# Altium PCB 模块封装大小.PcbDoc
Units mm, origin at the board's own origin, x right, y up, seen from the top; angles counter-clockwise.
Board outline 39.91 x 49.81 mm, 2 copper layers (Top Layer, Bottom Layer); 8 components, 31 nets, 86 pads, 0 vias.
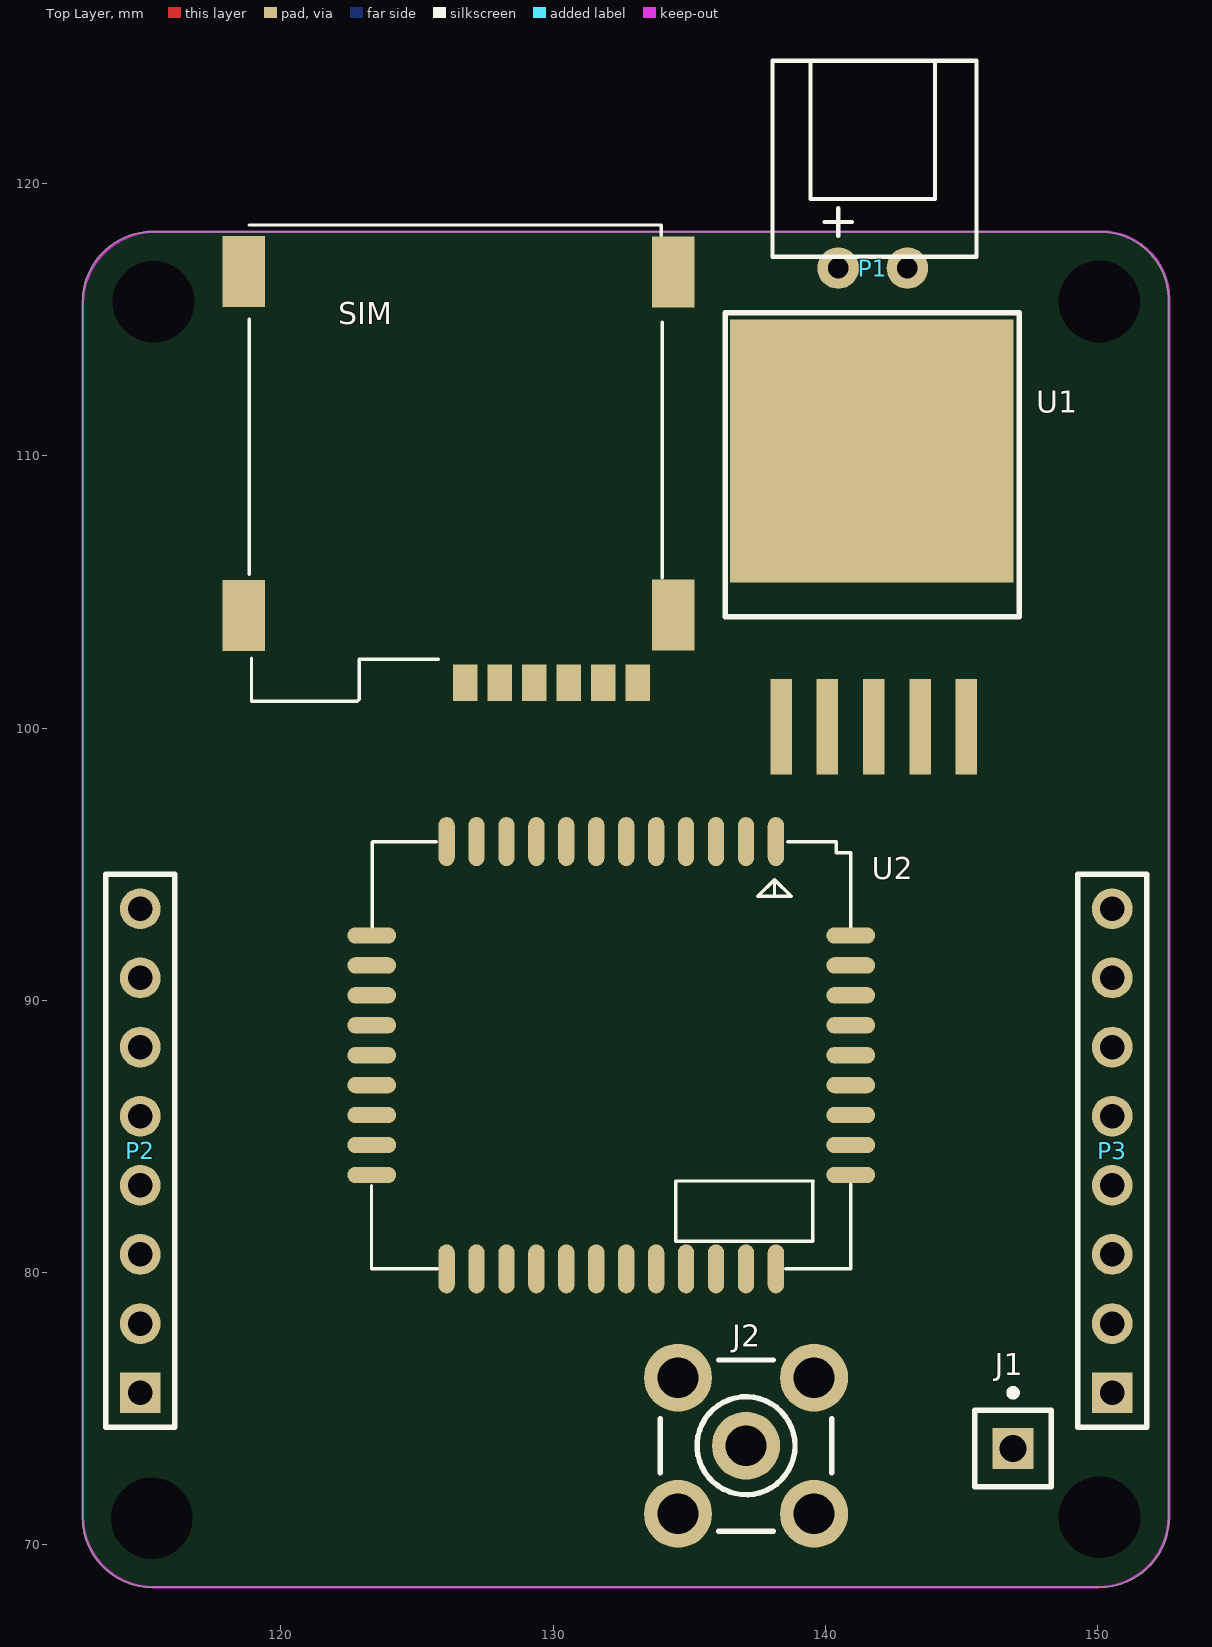
[diagram p0: Top Layer view]
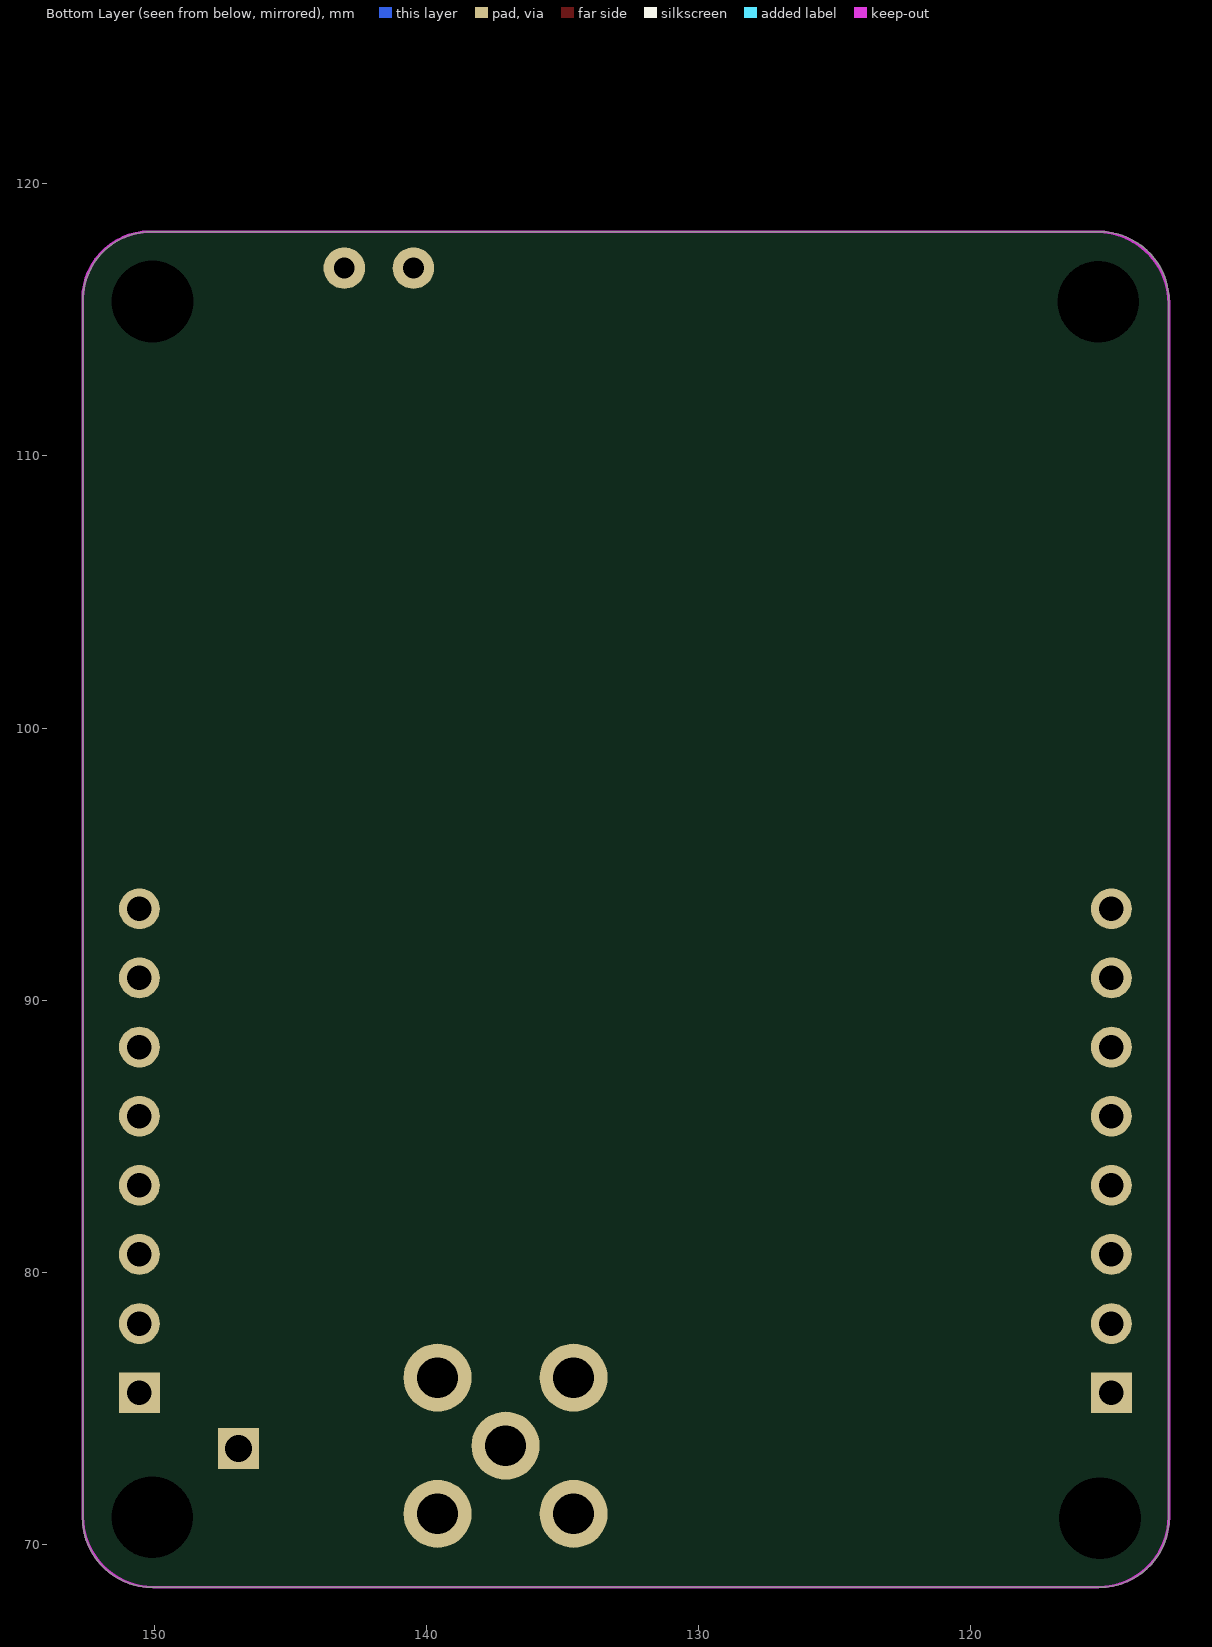
[diagram p1: Bottom Layer view, seen from below]

## Layer stack, top to bottom
Top Layer: signal copper 0.0356
Dielectric: dielectric 0.32, FR-4, Dk 4.8
Bottom Layer: signal copper 0.0356

## Board outline
112.717,93.015 112.717,115.697 cw(c115.257,115.697) 115.257,118.237 116.967,118.237 150.089,118.237 cw(c150.089,115.697) 152.629,115.697 152.629,104.902 152.629,70.968 cw(c150.089,70.968) 150.089,68.428 145.085,68.428 115.257,68.428 cw(c115.257,70.968) 112.717,70.968 112.717,88.849

## Design rules (kind name [scope] priority, off if disabled: settings)
Clearance [All] p1: gap=0.4
PolygonConnect [All] p1: connectstyle=Relief reliefconductorwidth=0.254 reliefentries=4 polygonreliefangle="90 Angle"
RoutingLayers [All] p1: top layer_v5=TRUE bottom layer_v5=FALSE
RoutingVias [All] p1: holewidth=0.511 width=1 viastyle="Through Hole" minholewidth=0.511 minwidth=1 maxholewidth=0.511 maxwidth=1
SilkscreenOverComponentPads [All] p1: minsilkscreentomaskgap=0.254
SolderMaskExpansion [All] p1: expansion=0.102
TestPointUsage [All] p1: valid=0 allowmultiple=FALSE
Testpoint [All] p1: side=15 testpointundercomponent=TRUE minsize=1.016 maxsize=2.54 preferedsize=1.524 minholesize=0 maxholesize=1.016 preferedholesize=0.813 testpointgrid=0.025 style=1023 order=0123456789
Width Width_1 [InNet('NetIPX2_2')] p1: maxlimit=0.6 minlimit=0.6 preferedwidth=0.6
Width Width_6 [InNet('SIM_VDD')] p2: maxlimit=0.5 minlimit=0.5 preferedwidth=0.5
Width Width_5 [InNet('NetIPX1_2')] p3: maxlimit=0.6 minlimit=0.6 preferedwidth=0.6
Width Width_3 [InNet('VCC')] p4: maxlimit=1.3 minlimit=1.3 preferedwidth=1.3
Width Width_2 [InNet('VCC_IN')] p5: maxlimit=1.3 minlimit=1.3 preferedwidth=1.3
Width [All] p6: maxlimit=0.254 minlimit=0.254 preferedwidth=0.254
22 further rules are at their usual default settings.

## Components (designator, comment, footprint, x,y, rotation, side; value= is the part's Value field where it differs from the comment)
J1 "Socket" PIN1 146.901,73.524 r0 top
J2 "SMB" SMB_V-RJ45 137.09,73.629 r0 top locked
P1 "Header 2" XH2.54 140.478,116.899 r180 top
P2 "Header 8" HDR1X8 114.832,75.577 r90 top
P3 "Header 8" HDR1X8 150.544,75.577 r90 top
SIM "microsim" MICRO_SIM 133.117,101.668 r180 top locked
U1 "MIC29302" MIC29302 141.786,100.173 r0 top
U2 "SIM800C" GSM_800C 138.187,95.828 r0 top locked

## Footprints (in the part's own frame and the unit in brackets; to place one, negate y for a bottom-side part, rotate by r counter-clockwise, add the part's x,y. Pads: shape width x height; smd on the part's side, far side on the other; paste and mask are expansions set on the pad)
GSM_800C [mm]
  oval 0.6x1.8 smd: 1(0,0) 2(-1.1,0) 3(-2.2,0) 4(-3.3,0) 5(-4.4,0) 6(-5.5,0) 7(-6.6,0) 8(-7.7,0) 9(-8.8,0) 10(-9.9,0) 11(-11,0) 12(-12.1,0) 22(-12.1,-15.7) 23(-11,-15.7) 24(-9.9,-15.7) 25(-8.8,-15.7) 26(-7.7,-15.7) 27(-6.6,-15.7) 28(-5.5,-15.7) 29(-4.4,-15.7) 30(-3.3,-15.7) 31(-2.2,-15.7) 32(-1.1,-15.7) 33(0,-15.7)
  oval 1.8x0.6 smd: 13(-14.85,-3.45) 14(-14.85,-4.55) 15(-14.85,-5.65) 16(-14.85,-6.75) 17(-14.85,-7.85) 18(-14.85,-8.95) 19(-14.85,-10.05) 20(-14.85,-11.15) 21(-14.85,-12.25) 34(2.75,-12.25) 35(2.75,-11.15) 36(2.75,-10.05) 37(2.75,-8.95) 38(2.75,-7.85) 39(2.75,-6.75) 40(2.75,-5.65) 41(2.75,-4.55) 42(2.75,-3.45)
  silkscreen extent -14.86,-15.7 2.74,0
HDR1X8 [mm] "Connector; Header; 8 Position"
  rect 1.5x1.5 hole 0.9: 1(0,0)
  round 1.5 hole 0.9: 2(2.54,0) 3(5.08,0) 4(7.62,0) 5(10.16,0) 6(12.7,0) 7(15.24,0) 8(17.78,0)
  silkscreen extent -1.27,-1.27 19.05,1.27
MIC29302 [mm]
  rect 10.414x9.652 smd: 0(-0.076,10.008)
  rect 0.79x3.5 smd: 1(-3.409,-0.128) 2(-1.707,-0.128) 3(-0.005,-0.128) 4(1.697,-0.128) 5(3.398,-0.128)
  silkscreen extent -5.46,3.91 5.33,15.09
MICRO_SIM [mm]
  rect 0.9x1.34 smd: 1(1.27,0) 2(3.81,0) 3(6.35,0) 5(0,0) 6(2.54,0) 7(5.08,0)
  rect 1.56x2.61 smd: ""(-1.295,-2.489) ""(-1.295,-15.088) ""(14.478,-2.464) ""(14.478,-15.113)
  silkscreen extent -0.89,-16.81 14.27,0.69
PIN1 [mm] "Connector; Plug"
  rect 1.5x1.5 hole 1: 1(0,0)
  silkscreen extent -1.4,-1.4 1.4,2.17
SMB_V-RJ45 [mm] "Connector; SMB Straight"
  round 2.5 hole 1.5: 1(0,0) 2(-2.5,-2.5) 2(-2.5,2.5) 2(2.5,-2.5) 2(2.5,2.5)
  silkscreen extent -3.15,-3.15 3.15,3.15
XH2.54 [mil]
  round 60 hole 30: 1(0,0) 2(-100,0)
  silkscreen extent -200,-300 95,-17

## Part data
J2: "SMB Straight Connector"
P1: "Header, 2-Pin"
P2 P3: "Header, 8-Pin"

## Free pads (board coordinates)
  round 1.524 hole 3: 0(115.252,70.96) 0(115.316,115.665) 0(150.062,115.674) 0(150.078,70.995)

## Nets (pads, with @x,y where several pads share a name; then routed paths per layer and width w, separated by ;. In a path a pad name is that pad's centre, name@x,y a point inside that pad or via, vN(x,y) a via of type N, cw(c..) or ccw(c..) an arc to the next point about the centre after c; other vN are vias at no path point)
ADC: 
DTR: 
GND: 
MCN: 
MCP: 
NetBT_ANT_2: 
NetGSM_ANT_2: 
NetNET_1: 
NetR1_2: 
NetR7_1: 
NetR12_2: 
NetR13_2: 
NetR14_1: 
PWRKEY: 
RI: 
RXD: 
SIM_CLK: 
SIM_DATA: 
SIM_RST: 
SIM_RX: 
SIM_TX: 
SIM_VDD: 
SPN: 
SPP: 
TXD: 
U2_R: 
U2_T: 
VCC: 
VCC_EXT: 
VCC_IN: 
VCC_MCU: 
pads on no net: J1.1 J2.1 J2.2 P1.1 P1.2 P2.1 P2.2 P2.3 P2.4 P2.5 P2.6 P2.7 P2.8 P3.1 P3.2 P3.3 P3.4 P3.5 P3.6 P3.7 P3.8 SIM. SIM.1 SIM.2 SIM.3 SIM.5 SIM.6 SIM.7 U1.0 U1.1 U1.2 U1.3 U1.4 U1.5 U2.1 U2.2 U2.3 U2.4 U2.5 U2.6 U2.7 U2.8 U2.9 U2.10 U2.11 U2.12 U2.13 U2.14 U2.15 U2.16 U2.17 U2.18 U2.19 U2.20 U2.21 U2.22 U2.23 U2.24 U2.25 U2.26 U2.27 U2.28 U2.29 U2.30 U2.31 U2.32 U2.33 U2.34 U2.35 U2.36 U2.37 U2.38 U2.39 U2.40 U2.41 U2.42

## Keep-outs
Keep-Out Layer:
  lines w0.1: 112.717,71.027 ccw(c115.317,71.027) 115.317,68.428 150.027,68.428 ccw(c150.027,71.029) 152.629,71.029 152.629,115.769 ccw(c150.161,115.769) 150.161,118.237 115.376,118.237 ccw(c115.376,115.578) 112.717,115.578 112.717,71.027